# EAGLE board Tinkercad Simulation (EAGLE 7.6.0)

Size 56.82 x 53.33 mm. Coordinates in mm from the lower left corner, seen from the top.
Outline: 0,0 56.82,0 56.82,53.33 0,53.33 0,0
Copper layers (1*16): Top 0.035mm / dielectric 1.5mm / Bottom 0.035mm
Design rules "default": minimum track width 10mil, minimum drill 24mil, track to track 8mil, track to pad 8mil, pad to pad 8mil, via to via 8mil, smd to smd 8mil, copper to edge 40mil, drill to drill 8mil, minimum pad ring 10mil, minimum via ring 8mil, stop-mask expansion 4mil, vias tented up to drill 0mil, thermal gap 10mil

## Footprints (pad centres in the part's own frame; a part is rotated, then mirrored left to right if it is on the bottom)
LED5MM = drill 0.813 octagon: A -1.27,0; K 1.27,0
2P-2.54-65/35MIL = drill 0.889 pad 1.651 square: 1 0,1.27 | drill 0.889 pad 1.651: 2 0,-1.27
0207/10 = drill 0.813 octagon: 1 -5.08,0; 2 5.08,0
DIP04YL = drill 0.813 long: 1 -3.81,-3.81; 2 -1.27,-3.81; 3 1.27,-3.81; 4 3.81,-3.81; 5 3.81,3.81; 6 1.27,3.81; 7 -1.27,3.81; 8 -3.81,3.81
DIL14 = drill 0.813 long: 1 -7.62,-3.81; 2 -5.08,-3.81; 3 -2.54,-3.81; 4 0,-3.81; 5 2.54,-3.81; 6 5.08,-3.81; 7 7.62,-3.81; 8 7.62,3.81; 9 5.08,3.81; 10 2.54,3.81; 11 0,3.81; 12 -2.54,3.81; 13 -5.08,3.81; 14 -7.62,3.81

## Placement (x,y rotation side)
D2  [LED5MM]  5,73.58 0 top  (outside the outline)
D3  [LED5MM]  5,251.38 0 top  (outside the outline)
D4  [LED5MM]  5,264.08 0 top  (outside the outline)
D5  [LED5MM]  5,276.78 0 top  (outside the outline)
D6  [LED5MM]  5,289.48 0 top  (outside the outline)
P1  5V  [2P-2.54-65/35MIL]  5,10.08 0 top
R1  1k‎Ω  [0207/10]  5,124.38 0 top  (outside the outline)
R1  1k‎Ω  [0207/10]  5,124.38 0 top  (outside the outline)
R2  1k‎Ω  [0207/10]  5,22.78 0 top
R3  1k‎Ω  [0207/10]  5,35.48 0 top
R4  1k‎Ω  [0207/10]  5,48.18 0 top
R5  1k‎Ω  [0207/10]  5,60.88 0 top  (outside the outline)
R6  1k‎Ω  [0207/10]  5,200.58 0 top  (outside the outline)
R7  1k‎Ω  [0207/10]  5,213.28 0 top  (outside the outline)
R8  1k‎Ω  [0207/10]  5,302.18 0 top  (outside the outline)
R9  1k‎Ω  [0207/10]  5,314.88 0 top  (outside the outline)
R10  1k‎Ω  [0207/10]  5,327.58 0 top  (outside the outline)
R11  1k‎Ω  [0207/10]  5,340.28 0 top  (outside the outline)
SW1-2-3-4  [DIP04YL]  5,86.28 0 top  (outside the outline)
SW3  [DIP04YL]  5,225.98 0 top  (outside the outline)
SWClock  [DIP04YL]  5,111.68 0 top  (outside the outline)
U1  [DIL14]  5,175.18 0 top  (outside the outline)
U2  [DIL14]  5,137.08 0 top  (outside the outline)
U3  [DIL14]  5,149.78 0 top  (outside the outline)
U4  [DIL14]  5,162.48 0 top  (outside the outline)
U6  [DIL14]  5,187.88 0 top  (outside the outline)
U7  [DIL14]  5,238.68 0 top  (outside the outline)

## Library data of the parts
D2-D6 P1 R1 R1-R11 SW1-2-3-4 SW3 SWClock U1-U4 U6 U7 = AUTODESK_CIRCUITS_BREADBOARD

## Nets
N$1: R4.2 SW1-2-3-4.4
N$2: R3.2 SW1-2-3-4.3
N$3: R1.2 SW1-2-3-4.2
N$4: SW1-2-3-4.8 U1.1 U3.2
N$5: R5.2 SW1-2-3-4.1
N$6: SW1-2-3-4.6 U1.9 U4.2
N$7: SWClock.3
N$8: SWClock.8
N$9: SWClock.4
N$10: SWClock.5
N$11: SWClock.1
N$12: R1.2 SWClock.2
N$13: SWClock.6
N$14: SW1-2-3-4.7 U1.4 U3.12
N$15: U1.6 U6.3
N$16: U1.3 U6.1
N$17: SW1-2-3-4.5 U1.12 U4.12
N$18: U3.6
N$19: U1.5 U3.9
N$20: U3.8
N$21: SWClock.7 U3.3 U3.11 U4.3 U4.11
N$22: U4.6
N$23: U1.13 U4.9
N$24: U1.10 U4.5
N$25: U4.8
N$26: U1.2 U3.5
N$27: D2.K R2.1
N$28: U2.12
N$29: U2.4 U6.6
N$30: U2.8
N$31: U2.10
N$32: U2.11
N$33: U2.3
N$34: U2.13
N$35: U2.5 U6.8
N$36: D2.A U2.6 U7.1 U7.4 U7.9 U7.12
N$37: U2.9
N$38: U6.12 U7.2
N$39: U2.1 U6.2
N$40: U1.11 U6.9
N$41: U2.2 U6.4
N$42: U6.10
N$43: U6.11
N$44: U1.8 U6.5
N$45: R6.2 SW3.1
N$46: R7.2 SW3.2
N$47: SW3.3
N$48: SW3.8 U6.13 U7.10 U7.13
N$49: SW3.4
N$50: SW3.5
N$51: SW3.6
N$52: SW3.7 U7.5
N$53: D3.A U7.3
N$54: P1.2 R1.1 R3.1 R4.1 R5.1 R6.1 R7.1 U1.14 U2.14 U3.1 U3.4 U3.10 U3.13 U3.14 U4.1 U4.4 U4.10 U4.13 U4.14 U6.14 U7.14
N$55: D5.A U7.11
N$56: D4.A U7.6
N$57: P1.1 R2.2 R8.2 R9.2 R10.2 R11.2 U1.7 U2.7 U3.7 U4.7 U6.7 U7.7
N$58: D6.A U7.8
N$59: D3.K R8.1
N$60: D4.K R9.1
N$61: D5.K R11.1
N$62: D6.K R10.1

## Tracks (layer width: path | path; a pad name or v marks a point on that pad's centre or on a via)
N$1  (1 unrouted)
N$2  (1 unrouted)
N$3  (1 unrouted)
N$4  (2 unrouted)
N$5  (1 unrouted)
N$6  (2 unrouted)
N$12  (1 unrouted)
N$14  (2 unrouted)
N$15  (1 unrouted)
N$16  (1 unrouted)
N$17  (2 unrouted)
N$19  (1 unrouted)
N$21  (4 unrouted)
N$23  (1 unrouted)
N$24  (1 unrouted)
N$26  (1 unrouted)
N$27  (1 unrouted)
N$29  (1 unrouted)
N$35  (1 unrouted)
N$36  (5 unrouted)
N$38  (1 unrouted)
N$39  (1 unrouted)
N$40  (1 unrouted)
N$41  (1 unrouted)
N$44  (1 unrouted)
N$45  (1 unrouted)
N$46  (1 unrouted)
N$48  (3 unrouted)
N$52  (1 unrouted)
N$53  (1 unrouted)
N$54  (21 unrouted)
N$55  (1 unrouted)
N$56  (1 unrouted)
N$57  (11 unrouted)
N$58  (1 unrouted)
N$59  (1 unrouted)
N$60  (1 unrouted)
N$61  (1 unrouted)
N$62  (1 unrouted)